# Altium PCB NIXIE_IN-14_big.pcbdoc
Units mm, origin at the board's own origin, x right, y up, seen from the top; angles counter-clockwise.
Board outline 141.22 x 110.49 mm, 2 copper layers (Top Layer, Bottom Layer); 39 components, 62 nets, 239 pads, 0 vias.
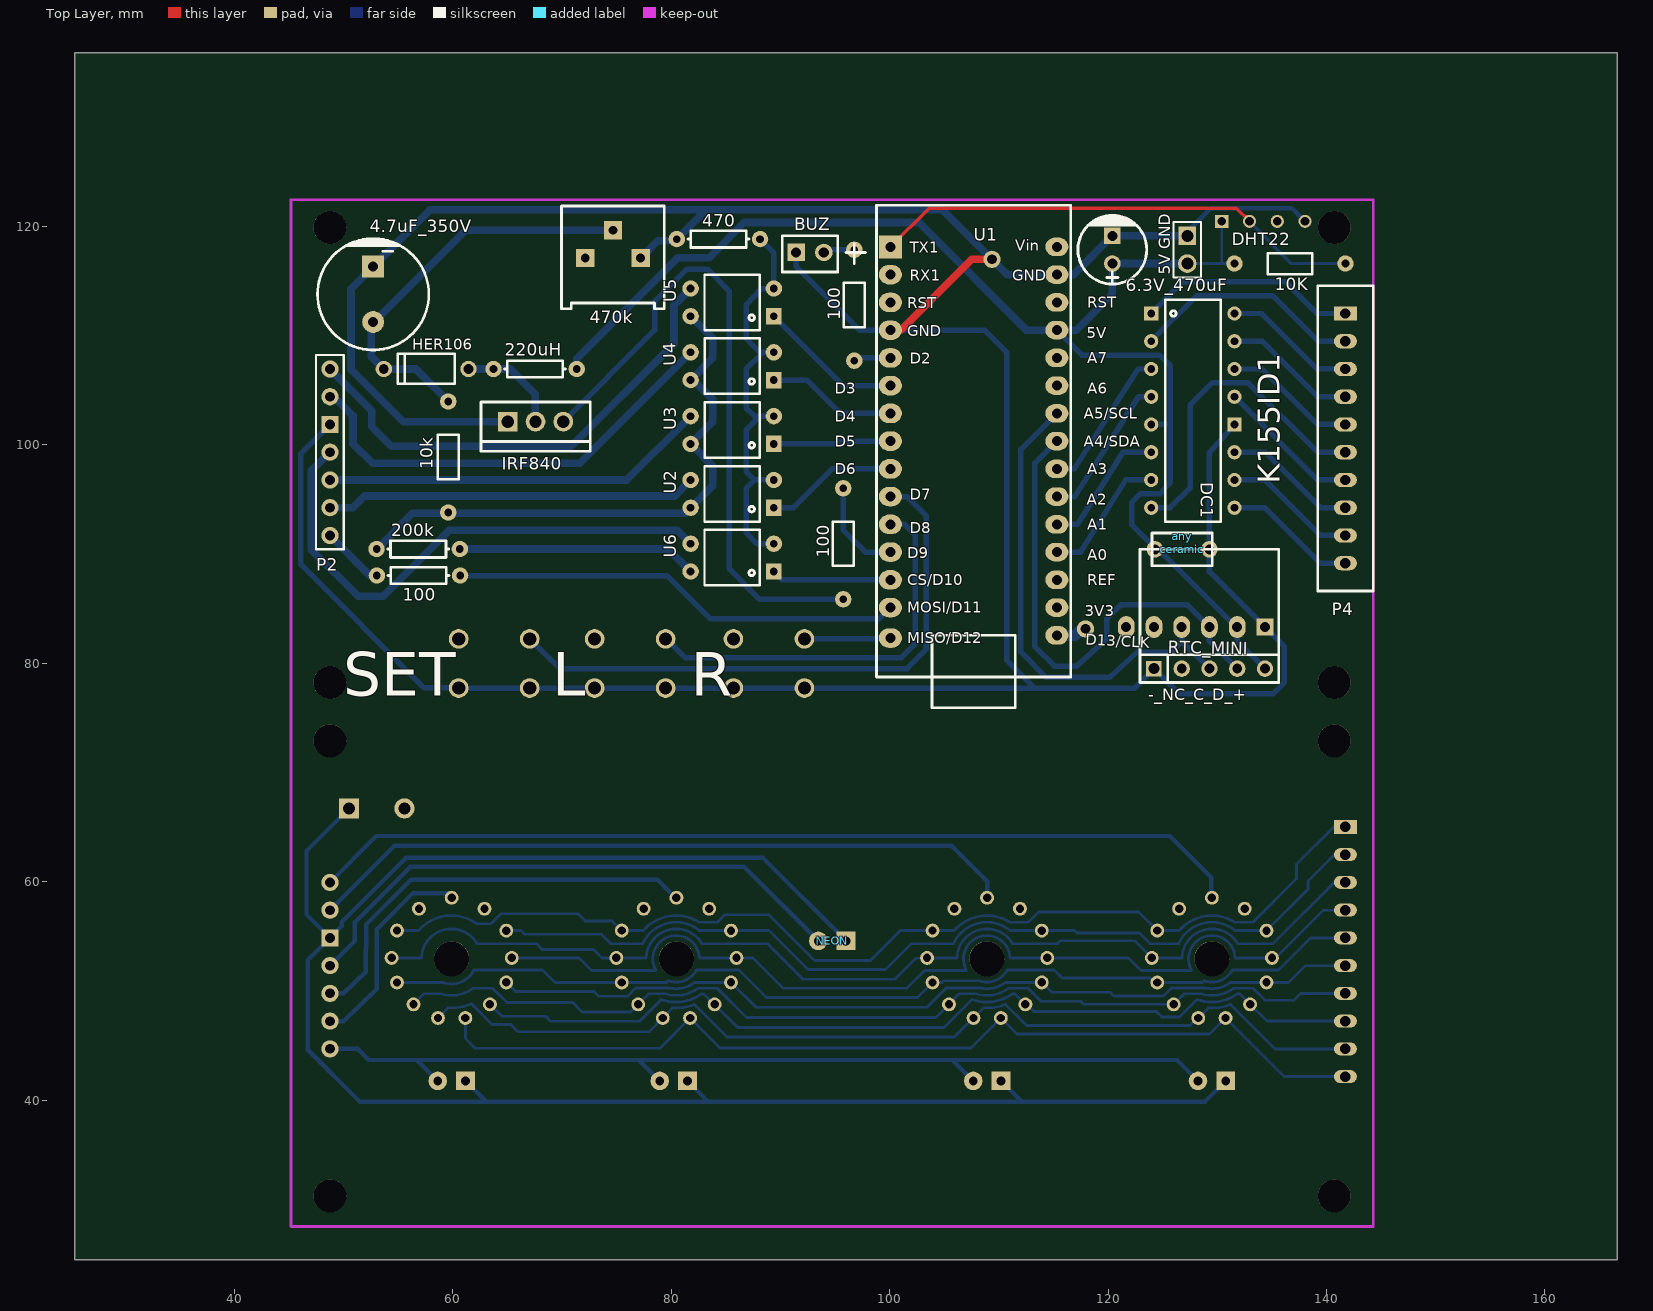
[diagram p0: Top Layer view]
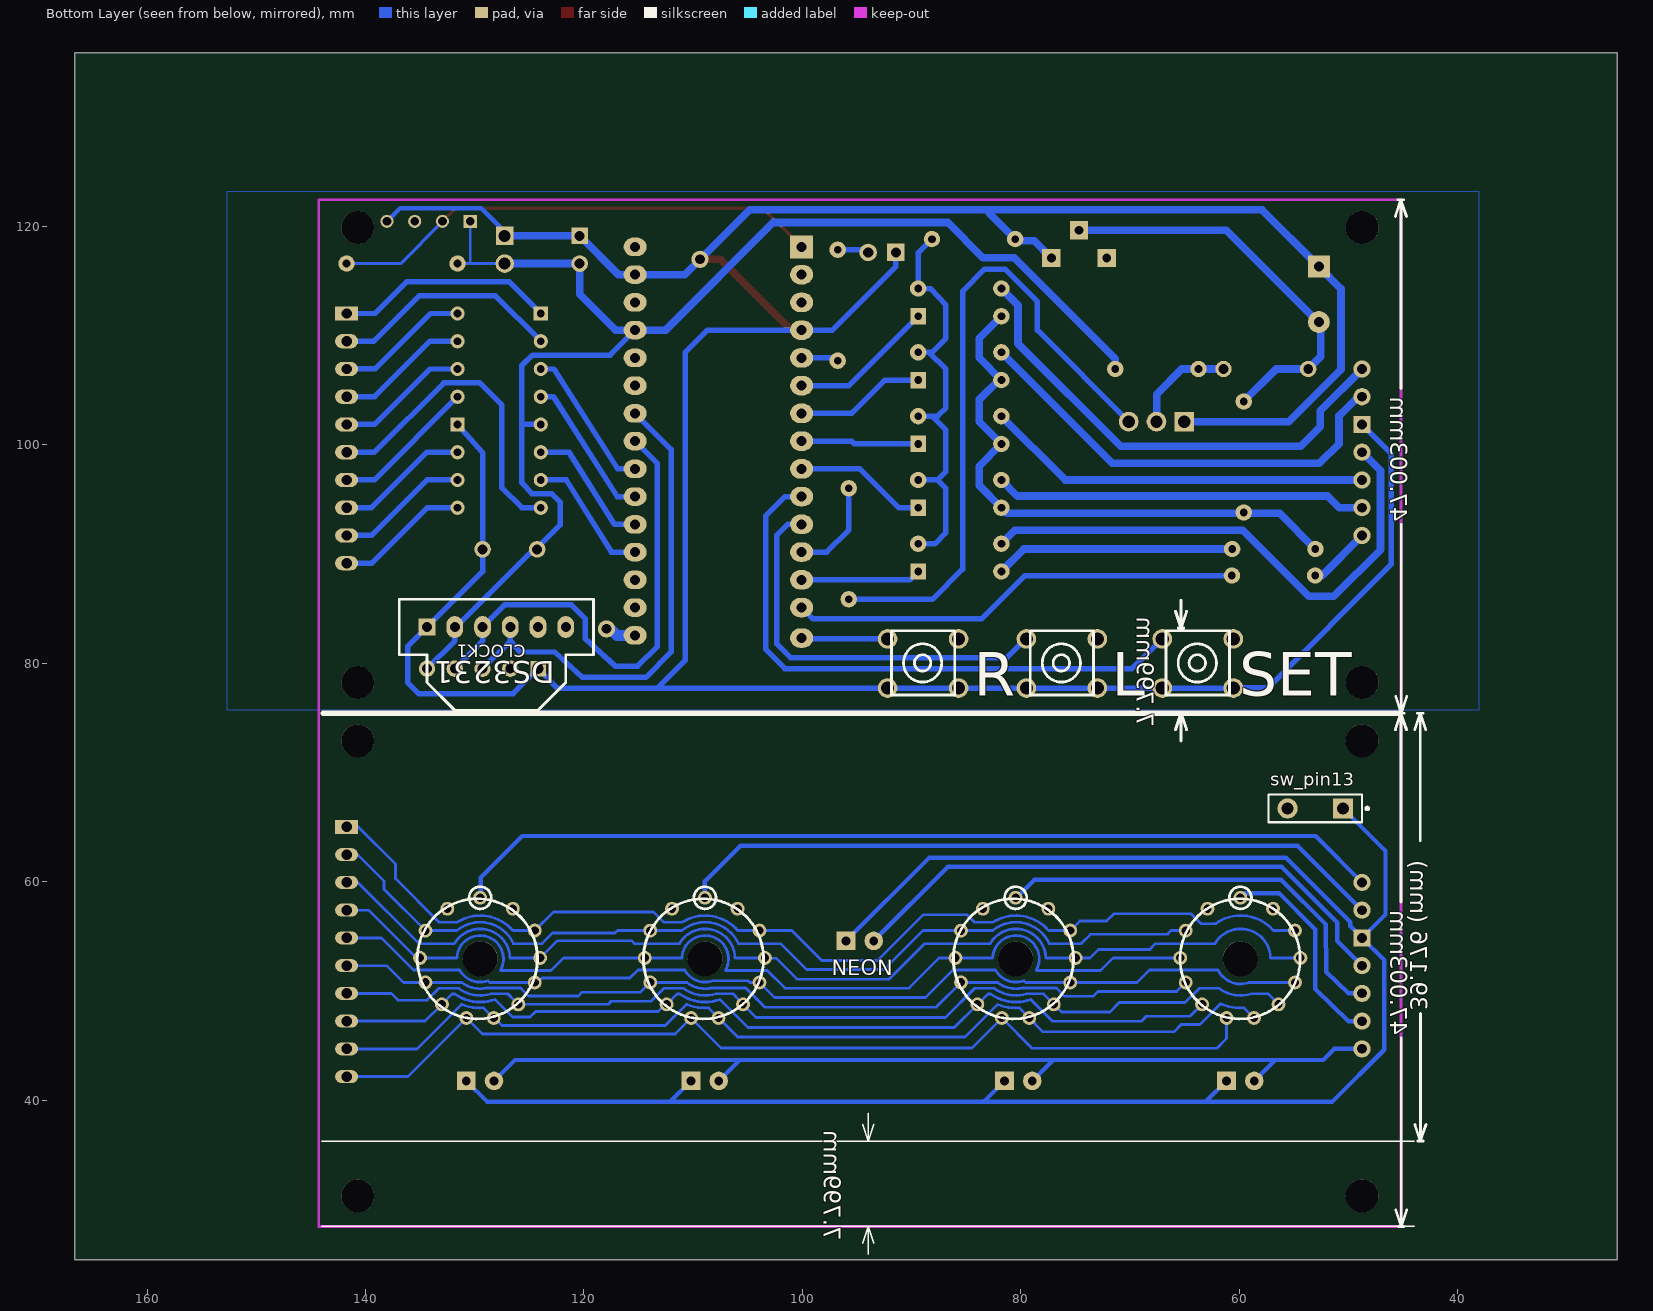
[diagram p1: Bottom Layer view, seen from below]

## Layer stack, top to bottom
Top Solder: solder mask 0.0102, Solder Resist, Dk 3.5
Top Layer: signal copper 0.0356
Dielectric1: dielectric 0.32, FR-4, Dk 4.8
Bottom Layer: signal copper 0.0356
Bottom Solder: solder mask 0.0102, Solder Resist, Dk 3.5

## Board outline
166.624,25.4 25.4,25.4 25.4,135.89 166.624,135.89

## Design rules (kind name [scope] priority, off if disabled: settings)
Clearance [All] p1: gap=0.254 ignorepadtopadclearanceinfootprint=FALSE
DiffPairsRouting [All] p1: maxlimit=0.5 minlimit=0.254 mostfreqgap=0.254 toplayer_minwidth=0.254 toplayer_maxwidth=0.381 toplayer_prefwidth=0.381 bottomlayer_minwidth=0.254 bottomlayer_maxwidth=0.381 bottomlayer_prefwidth=0.381 maxuncoupledlength=12.7
HoleSize [All] p1: absolutevalues=TRUE maxlimit=4.54 minlimit=0.025 maxpercent=80.000 minpercent=20.000
PolygonConnect [All] p1: connectstyle=Relief reliefconductorwidth=0.254 reliefentries=4 polygonreliefangle="90 Angle" airgapwidth=0.254
RoutingVias [All] p1: holewidth=0.711 width=1.27 viastyle="Through Hole" minholewidth=0.711 minwidth=1.27 maxholewidth=0.711 maxwidth=1.27
SilkToSilkClearance [All] p1: silktosilkclearance=0
SolderMaskExpansion [All] p1: expansion=0.102
UnRoutedNet [All] p1: checkbadconnections=TRUE
Width [All] p1: maxlimit=1 minlimit=0.254 preferedwidth=0.254
26 further rules are at their usual default settings.

## Components (designator, comment, footprint, x,y, rotation, side; value= is the part's Value field where it differs from the comment)
4.7uF_350V "4.7u 350В" CP_10X13MM 52.725,113.775 r0 top
"5V GND" "HDR-2X1/2.54" HDR-2X1/2.54 127.254,117.856 r0 top (schematic designator 5V)
6.3V_470uF "CAP-D6.3XF2.5" CAP-D6.3XF2.5 120.396,117.856 r90 top
10k "10k" RC06 59.6,93.8 r90 top
10K "10k" RC06 141.732,116.586 r180 top
100 "22k" RC06 95.758,96.012 r270 top
100 "330k" RC06 96.774,117.856 r270 top
100 "AXIAL-0.3" AXIAL-0.3 56.875,88.025 r0 top
200k "AXIAL-0.3" AXIAL-0.3 56.85,90.45 r0 top
220uH "AXIAL-0.3" AXIAL-0.3 67.548,106.934 r0 top
470 "AXIAL-0.3" AXIAL-0.3 84.335,118.825 r0 top
470k "_" 3386K 74.676,117.094 r0 top
"any / ceramic" "CAP-HV-5.0*3.0" CAP-HV-5.0*3.0 126.746,90.424 r180 top (schematic designator any)
BUZ "Buzzer" 2PIN_mod 87.63,117.602 r180 top
CLOCK1 "DS3231" DS3231 126.746,83.312 r180 bottom
DC1 "К155ИД1" DIP16_mod 123.952,112.014 r270 top (schematic designator DС1)
DHT22 "_" ? 134.275,120.45 r0 top
HER106 "HER106" DO-41 61.452,106.934 r180 top
IRF840 "IRF840" TO-220_mod 67.818,101.854 r180 top
L "KEY-6.0*6.0-2" KEY-6.0*6.0-2 76.2,80.01 r0 bottom (schematic designator S2)
LED "LED" LED3MM 59.909,41.759 r0 top
LED "LED" LED3MM 80.229,41.759 r0 top
LED "LED" LED3MM 108.931,41.759 r0 top
LED "LED" LED3MM 129.505,41.759 r0 top
NEON "LED" LED3MM 94.742,54.581 r0 top
P1 "HDR-7X1/2.54" HDR-7X1/2.54 48.768,52.311 r0 top
P2 "HDR-7X1/2.54" HDR-7X1/2.54 48.768,99.314 r0 top
P3 "10PIN" B10B_mod#1 141.732,54.851 r90 top
P4 "10PIN" B10B_mod#2 141.732,101.854 r90 top
R "KEY-6.0*6.0-2" KEY-6.0*6.0-2 88.9,80.01 r0 bottom (schematic designator S3)
RTC_MINI "HEADER_PRG_1X05" HEADER_PRG_1X05 129.286,79.502 r0 top
SET "KEY-6.0*6.0-2" KEY-6.0*6.0-2 63.754,80.01 r0 bottom (schematic designator S1)
sw_pin13 "sw" SPST-2 53.05,66.7 r0 bottom
U1 "ARDUINO-NANO-V3.0" "ARDUINO_NANO V3" 107.696,100.33 r0 top
U2 "TLP627" DIP4_mod 89.408,94.234 r90 top
U3 "TLP627" DIP4_mod 89.408,100.076 r90 top
U4 "TLP627" DIP4_mod 89.408,105.918 r90 top
U5 "TLP627" DIP4_mod 89.408,111.76 r90 top
U6 "TLP627" DIP4_mod 89.408,88.392 r90 top

## Footprints (in the part's own frame and the unit in brackets; to place one, negate y for a bottom-side part, rotate by r counter-clockwise, add the part's x,y. Pads: shape width x height; smd on the part's side, far side on the other; paste and mask are expansions set on the pad)
2PIN_mod [mm]
  round 1.6 hole 0.95: 1(-6.35,0)
  rect 1.6x1.6 hole 0.95: 2(-3.81,0)
  silkscreen extent -10.16,-1.52 -2.54,1.78
3386K [mil]
  rect 66x66 hole 32: 1(-100.01,0.01) 2(-0.01,100.01) 3(99.99,0.01)
  silkscreen extent -185,-183 185,187
"ARDUINO_NANO V3" [mm]
  rect 2.1x2.1 hole 0.914: 1(-7.62,17.78)
  oval 2.1x1.778 hole 0.914: 2(-7.62,15.24) 3(-7.62,12.7) 4(-7.62,10.16) 5(-7.62,7.62) 6(-7.62,5.08) 7(-7.62,2.54) 8(-7.62,0) 9(-7.62,-2.54) 10(-7.62,-5.08) 11(-7.62,-7.62) 12(-7.62,-10.16) 13(-7.62,-12.7) 14(-7.62,-15.24) 15(-7.62,-18.034)
  oval 2.1x1.7 hole 0.914: 16(7.62,-17.78) 17(7.62,-15.24) 18(7.62,-12.7) 19(7.62,-10.16) 20(7.62,-7.62) 21(7.62,-5.08) 22(7.62,-2.54) 23(7.62,0) 24(7.62,2.54) 25(7.62,5.08) 26(7.62,7.62) 27(7.62,10.16) 28(7.62,12.7) 29(7.62,15.24) 30(7.62,17.78)
  silkscreen extent -8.89,-24.4 8.89,21.59
AXIAL-0.3 [mm]
  round 1.5 hole 0.7: 1(-3.81,0) 2(3.81,0)
  silkscreen extent -2.79,-0.76 2.79,0.76
B10B_mod#1 [mm]
  rect 1.3x2.1 hole 0.95: 1(10.16,0)
  oval 1.2x2.1 hole 0.95: 2(7.62,0) 3(5.08,0) 4(2.54,0) 5(0,0) 6(-2.54,0) 7(-5.08,0) 8(-7.62,0) 9(-10.16,0) 10(-12.7,0)
B10B_mod#2 [mm]
  rect 1.3x2.1 hole 0.95: 1(10.16,0)
  oval 1.3x2.1 hole 0.95: 2(7.62,0) 3(5.08,0) 4(2.54,0) 5(0,0) 6(-2.54,0) 7(-5.08,0) 8(-7.62,0) 9(-10.16,0) 10(-12.7,0)
  silkscreen extent -15.24,-2.54 12.7,2.54
CAP-D6.3XF2.5 [mil]
  round 60 hole 36: 1(-50,0)
  rect 60x60 hole 36: 2(50,0)
  silkscreen extent -124,-124 125,124
CAP-HV-5.0*3.0 [mil]
  round 60 hole 36: 1(-100,0) 2(96.8,0)
  silkscreen extent -110,-59 107,59
CP_10X13MM [mm]
  round 2 hole 0.9: 1(0,-2.54)
  rect 2x2 hole 0.9: 2(0,2.54)
  silkscreen extent -5.1,-5.09 5.1,5.09
DIP4_mod [mm]
  rect 1.5x1.397 hole 0.711: 1(0,0)
  round 1.5 hole 0.711: 2(2.54,0) 3(2.54,7.62) 4(0,7.62)
  silkscreen extent -1.27,1.27 3.81,6.35
DIP16_mod [mm]
  rect 1.3x1.3 hole 0.701: 1(0,0) 12(10.16,7.62)
  round 1.3 hole 0.701: 2(2.54,0) 3(5.08,0) 4(7.62,0) 5(10.16,0) 6(12.7,0) 7(15.24,0) 8(17.78,0) 9(17.78,7.62) 10(15.24,7.62) 11(12.7,7.62) 13(7.62,7.62) 14(5.08,7.62) 15(2.54,7.62) 16(0,7.62)
  silkscreen extent -1.27,1.27 19.05,6.35
DO-41 [mm]
  round 1.5 hole 0.889: 1(0,0) 2(7.747,0)
  silkscreen extent 1.27,-1.37 6.48,1.37
DS3231 [mm]
  rect 1.52x1.52 hole 0.914: 1(-7.62,0)
  oval 1.524x2 hole 0.914: 2(-5.08,0) 3(-2.54,0)
  oval 1.54x2 hole 0.914: 4(0,0) 5(2.54,0) 6(5.08,0)
  silkscreen extent -10.16,-7.62 7.62,2.54
HDR-2X1/2.54 [mm]
  rect 1.575x1.7 hole 1.1: 1(0,1.27)
  round 1.7 hole 1.1: 2(0,-1.27)
  silkscreen extent -1.27,-2.54 1.27,2.54
HDR-7X1/2.54 [mil]
  round 62 hole 35: 1(-0.01,300) 2(-0.01,200) 4(-0.01,0) 5(-0.01,-100) 6(-0.01,-200) 7(-0.01,-300)
  rect 62x62 hole 35: 3(-0.01,100)
HEADER_PRG_1X05 [mm]
  rect 1.415x1.415 hole 1.016: 1(-5.08,0)
  round 1.5 hole 0.9: 2(-2.54,0) 3(0,0) 4(2.54,0) 5(5.08,0)
  silkscreen extent -6.35,-1.27 6.35,1.27
KEY-6.0*6.0-2 [mm]
  round 1.8 hole 1.2: 1(-3.198,2.286) 2(3.302,2.286) 3(-3.198,-2.214) 4(3.302,-2.214)
  silkscreen extent -2.84,-2.96 2.95,2.93
LED3MM [mm]
  round 1.7 hole 0.813: A(-1.27,0)
  rect 1.7x1.7 hole 0.813: K(1.27,0)
RC06 [mm]
  round 1.5 hole 0.711: 1(0,0) 2(10.16,0)
  silkscreen extent 3.05,-0.96 7.11,0.97
SPST-2 [mm] "Switch; 2 Leads"
  rect 1.85x1.85 hole 1.1: 1(-2.54,0)
  round 1.85 hole 1.1: 2(2.54,0)
  silkscreen extent -4.89,-1.27 4.28,1.27
TO-220_mod [mm]
  round 1.8 hole 1.118: 1(-2.312,-0.254) 2(0.229,-0.254)
  rect 1.8x1.8 hole 1.118: 3(2.769,-0.254)
  silkscreen extent -4.78,-2.05 5.22,2.45
? [mm]
  round 1.199 hole 0.798: DATA(-1.321,0) GND(3.759,0) NULL(1.219,0)
  rect 1.199x1.199 hole 0.798: VDD(-3.86,0.003)

## Free pads (board coordinates)
  round 1.27 hole 0.762: 1(59.909,58.523) 1(80.483,58.523) 1(108.931,58.523) 1(129.505,58.523) 2(58.662,47.52) 2(79.236,47.52) 2(107.683,47.52) 2(128.257,47.52) 3(54.412,53.019) 3(74.986,53.019) 3(103.434,53.019) 3(124.008,53.019) 4(65.41,53.019) 4(85.984,53.019) 4(114.432,53.019) 4(135.006,53.019) 5(64.913,55.516) 5(85.487,55.516) 5(113.934,55.516) 5(134.508,55.516) 6(62.914,57.522) 6(83.488,57.522) 6(111.935,57.522) 6(132.509,57.522) 7(54.91,55.521) 7(75.484,55.521) 7(103.932,55.521) 7(124.506,55.521) 8(56.914,57.522) 8(77.488,57.522) 8(105.936,57.522) 8(126.51,57.522) 9(54.91,50.766) 9(75.484,50.766) 9(103.932,50.766) 9(124.506,50.766) 10(56.414,48.769) 10(76.988,48.77) 10(105.436,48.77) 10(126.01,48.77) 11(61.166,47.515) 11(81.74,47.515) 11(110.188,47.515) 11(130.762,47.515) 12(63.411,48.769) 12(83.985,48.77) 12(112.433,48.77) 12(133.007,48.77) 13(64.913,50.776) 13(85.487,50.776) 13(113.934,50.776) 13(134.508,50.776)
  round 1.575 hole 0.889: 214(109.375,116.975) 214(117.937,83.14)
  round 3 hole 3 unplated: ""(48.768,31.229) ""(48.768,72.885) ""(48.768,78.232) ""(48.768,119.888) ""(140.716,78.232) ""(140.716,119.888) ""(140.716,31.229) ""(140.716,72.885)
  round 3.2 hole 3.2 unplated: ""(59.909,52.935) ""(80.483,52.935) ""(108.905,52.935) ""(129.505,52.935)

## Nets (pads, with @x,y where several pads share a name; then routed paths per layer and width w, separated by ;. In a path a pad name is that pad's centre, name@x,y a point inside that pad or via, vN(x,y) a via of type N, cw(c..) or ccw(c..) an arc to the next point about the centre after c; other vN are vias at no path point)
$BoardOutlineNet: 
+5V: 6.3V_470uF.1 10K.2 220uH.2 "5V GND.2" "any / ceramic.2" CLOCK1.2 DC1.5 DHT22.VDD RTC_MINI.5 U1.27 | length 127.3
  Bottom Layer w0.254: 127.254,116.586 130.425,116.586 ; DHT22.VDD 130.415,116.596 130.425,116.586 ; 10K.2 130.425,116.586 ; CLOCK1.2@131.731,83.312 CLOCK1.2
  Bottom Layer w0.5: U1.27 117.602,108.204 124.696,108.204 125.7,107.233 125.7,101.919 ; DC1.5 125.7,101.854 125.7,96.548 124.769,95.504 122.936,95.504 122.174,94.742 122.174,92.666 124.291,90.549 ; 124.287,90.424 124.619,90.424 CLOCK1.2@131.731,83.312 ; CLOCK1.2 131.826,82.042 RTC_MINI.5
  Bottom Layer w0.7: 220uH.2 71.358,107.883 80.6,117.125 83.483,117.125 86.708,120.35 102.675,120.35 112.535,110.49 U1.27 117.094,110.49 120.396,113.792 6.3V_470uF.1 127.254,116.586
B0: DC1.7 U1.19 | length 12.3
  Bottom Layer w0.5: U1.19 117.484,90.17 121.612,96.774 DC1.7
B1: DC1.6 U1.20 | length 12.3
  Bottom Layer w0.5: U1.20 117.202,92.71 121.363,99.314 DC1.6
B2: DC1.4 U1.21 | length 13.6
  Bottom Layer w0.5: U1.21 116.949,95.25 122.791,104.394 DC1.4
B3: DC1.3 U1.22 | length 13.6
  Bottom Layer w0.5: U1.22 116.903,97.79 122.745,106.934 DC1.3
BACKL: 100.1@53.065,88.025 P2.7 | length 5.8
  Bottom Layer w0.7: P2.7 52.437,88.025 100.1@53.065,88.025
BACKL2: LED.A P1.7 | length 88.8
  Bottom Layer w0.4: P1.7 51.309,44.691 52.325,43.675 56.723,43.675 ; LED.A@58.639,41.759 56.723,43.675 ; LED.A@78.959,41.759 77.043,43.675 ; LED.A@107.661,41.759 105.745,43.675 ; LED.A@128.235,41.759 126.319,43.675 105.745,43.675 ; 56.723,43.675 77.043,43.675 ; 77.043,43.675 105.745,43.675
BUTT1: SET.4 U1.10 | length 54.4
  Bottom Layer w0.5: SET.4 69.85,79.502 101.6,79.502 103.378,81.28 103.378,93.472 101.6,95.25 U1.10
BUTT2: L.4 U1.11 | length 36.6
  Bottom Layer w0.5: L.4@79.573,82.225 81.28,80.518 101.092,80.518 102.362,81.788 102.362,91.694 101.346,92.71 U1.11
BUTT3: R.4 U1.15 | length 7.9
  Bottom Layer w0.5: R.4 100.005,82.225 U1.15
BUZZERPIN: 100.1@96.774,117.855 BUZ.1 | length 2.9
  Bottom Layer w0.5: BUZ.1 94.233,117.855 100.1@96.774,117.855
DC1_1: DC1.1 P4.1 | length 20.2
  Bottom Layer w0.5: DC1.1 126.838,114.9 136.225,114.9 139.111,112.014 P4.1
DC1_2: DC1.2 P4.2 | length 21.2
  Bottom Layer w0.5: DC1.2 128.128,113.65 135.05,113.65 139.226,109.474 P4.2
DC1_8: DC1.8 P4.6 | length 29.6
  Bottom Layer w0.5: DC1.8 125.684,94.234 127.508,96.058 127.508,103.632 129.54,105.664 132.836,105.664 139.186,99.314 P4.6
DC1_9: DC1.9 P4.10 | length 12.3
  Bottom Layer w0.5: DC1.9 134.341,94.234 139.421,89.154 P4.10
DC1_10: DC1.10 P4.9 | length 12.3
  Bottom Layer w0.5: DC1.10 134.351,96.774 139.431,91.694 P4.9
DC1_11: DC1.11 P4.8 | length 12.3
  Bottom Layer w0.5: DC1.11 134.386,99.314 139.466,94.234 P4.8
DC1_13: DC1.13 P4.7 | length 13.3
  Bottom Layer w0.5: DC1.13 139.192,96.774 P4.7
DC1_14: DC1.14 P4.5 | length 12.3
  Bottom Layer w0.5: DC1.14 134.091,106.934 139.171,101.854 P4.5
DC1_15: DC1.15 P4.4 | length 12.3
  Bottom Layer w0.5: DC1.15 134.076,109.474 139.156,104.394 P4.4
DC1_16: DC1.16 P4.3 | length 12.3
  Bottom Layer w0.5: DC1.16 134.036,112.014 139.116,106.934 P4.3
DHT22DATA: 10K.1 DHT22.DATA U1.1 | length 45.3
  Top Layer w0.3: U1.1 103.616,121.65 131.754,121.65 DHT22.DATA
  Bottom Layer w0.3: DHT22.DATA@132.954,120.396 136.764,116.586 10K.1
  Bottom Layer w0.5: DHT22.DATA@132.954,120.396 DHT22.DATA
DISP2_3: P3.10 pad.11 | length 89.7
  Bottom Layer w0.254: pad.11@61.166,47.515 61.166,45.634 62.05,44.75 78.975,44.75 81.74,47.515 84.48,44.775 107.448,44.775 110.188,47.515 111.653,46.05 129.297,46.05 130.762,47.515 136.126,42.151 P3.10
DISP2_4: P3.9 pad.2 | length 91.1
  Bottom Layer w0.254: pad.2@58.632,47.52 59.558,48.446 ; 59.566,48.446 ccw(c59.88,52.935) 61.71,48.824 63.609,46.925 65.325,46.925 66,46.25 77.966,46.25 pad.2@79.236,47.52 ; pad.2@79.207,47.52 80.133,48.446 ; 80.141,48.446 ccw(c80.455,52.935) 82.141,48.763 ; 82.138,48.76 85.119,45.78 105.917,45.78 108.583,48.446 ; 108.591,48.446 ccw(c108.905,52.935) 110.591,48.763 ; 110.618,48.769 112.562,46.825 127.516,46.825 128.21,47.52 128.257,47.52 129.183,48.446 129.191,48.446 ccw(c129.505,52.935) 131.191,48.763 ; 131.218,48.769 135.296,44.691 P3.9
DISP2_5: P3.8 pad.12 | length 85.1
  Bottom Layer w0.254: pad.12@63.411,48.769 64.506,47.675 68.525,47.675 68.975,47.225 77.112,47.225 79.101,49.214 ccw(c80.455,52.935) 82.726,49.691 ; 82.75,49.708 83.019,49.708 83.957,48.77 83.985,48.77 86.105,46.65 104.987,46.65 107.551,49.214 ccw(c108.905,52.935) 111.176,49.691 ; 111.2,49.708 111.469,49.708 pad.12@112.407,48.77 ; pad.12@112.433,48.77 112.546,48.77 113.208,48.107 124.418,48.107 124.925,47.6 126.537,47.6 128.151,49.214 ccw(c129.505,52.935) 131.776,49.691 ; 131.8,49.708 132.069,49.708 133.007,48.77 134.546,47.231 P3.8
DISP2_9: P3.4 pad.4 | length 91.8
  Bottom Layer w0.254: pad.4@65.381,53.019 65.41,53.019 71.556,53.019 72.706,51.869 78.57,51.869 ; 78.59,51.901 cw(c80.455,52.935) 82.584,53.047 ; 82.6,53.019 pad.4@85.956,53.019 ; pad.4@85.984,53.019 87.481,53.019 90.25,50.25 101.606,50.25 103.225,51.869 107.02,51.869 ; 107.04,51.901 cw(c108.905,52.935) 111.034,53.047 ; 111.05,53.019 pad.4@114.406,53.019 ; pad.4@114.432,53.019 121.881,53.019 123.031,51.869 127.62,51.869 ; 127.64,51.901 cw(c129.505,52.935) 131.634,53.047 ; 131.65,53.019 135.006,53.019 135.344,53.019 139.716,57.391 P3.4
DISP2_10: P3.3 pad.3 | length 100.8
  Bottom Layer w0.254: pad.3@54.383,53.019 57.115,53.019 ; 57.142,53.031 cw(c59.88,52.935) 62.241,54.326 67.675,54.325 68.2,53.8 72.9,53.8 73.681,53.019 74.986,53.019 77.69,53.019 ; 77.717,53.031 cw(c80.455,52.935) 82.816,54.326 88.8,54.325 92.05,51.075 100.5,51.075 102.418,52.993 103.408,52.993 103.434,53.019 106.14,53.019 ; 106.167,53.031 cw(c108.905,52.935) 111.266,54.326 115.375,54.325 115.65,54.6 122.427,54.6 124.008,53.019 126.74,53.019 ; 126.767,53.031 cw(c129.505,52.935) 131.866,54.326 135.1,54.325 140.706,59.931 P3.3
DISP2_11: P3.2 pad.5 | length 86.2
  Bottom Layer w0.254: pad.5@64.913,55.516 66.266,55.516 66.606,55.175 73.625,55.175 74.475,54.325 77.41,54.325 ; 77.419,54.351 cw(c80.455,52.935) 82.563,55.538 ; 82.61,55.516 pad.5@85.458,55.516 ; pad.5@85.487,55.516 88.959,55.516 92.525,51.95 99.625,51.95 102,54.325 105.86,54.325 ; 105.869,54.351 cw(c108.905,52.935) 111.013,55.538 ; 111.06,55.516 pad.5@113.908,55.516 ; pad.5@113.934,55.516 116.934,55.516 117.15,55.3 122.875,55.3 123.85,54.325 126.46,54.325 ; 126.469,54.351 cw(c129.505,52.935) 131.613,55.538 ; 131.66,55.516 134.508,55.516 138.3,59.308 138.3,60.05 140.721,62.471 P3.2
GND: 4.7uF_350V.2 6.3V_470uF.2 470.1 470k.3 "5V GND.1" "any / ceramic.1" BUZ.2 CLOCK1.1 DC1.12 DHT22.GND IRF840.3 L.1 L.2 P2.3 pad.214@109.375,116.975 R.1 R.2 RTC_MINI.1 SET.1 SET.2 U1.4 U1.29 | length 332.9
  Top Layer w0.5: U1.4 U1.4@101.04,110.49
  Top Layer w0.7: U1.4@101.04,110.49 107.525,116.975 pad.214@109.375,116.975
  Bottom Layer w0.4: 127.254,119.126 127.254,119.504 129.403,121.653 136.831,121.653 137.837,120.647 DHT22.GND@138.29,120.647
  Bottom Layer w0.5: P2.3 46.075,99.161 46.075,98.475 46.075,89.075 57.4,77.75 SET.1@60.683,77.75 ; SET.1@61.064,77.724 SET.2 L.1 L.2 R.1 R.2 122.428,77.724 122.454,77.75 RTC_MINI.1 126.492,77.216 135.128,77.216 136.144,78.232 136.144,81.534 CLOCK1.1 129.286,88.392 129.286,99.282 DC1.12 ; BUZ.2 91.44,116.31 97.26,110.49 108.712,110.49 110.744,108.458 110.744,80.264 113.258,77.75
  Bottom Layer w0.7: IRF840.3 55.475,102.108 50.7,106.883 50.7,114.291 4.7uF_350V.2 57.934,121.525 82.9,121.525 ; 470k.3 78.794,118.672 80.372,118.672 470.1 82.9,121.2 82.9,121.525 ; 127.254,119.126 6.3V_470uF.2 116.84,115.57 110.78,115.57 109.375,116.975 104.825,121.525 82.9,121.525
GND2: LED.K NEON.K P1.3 sw_pin13.1 | length 173.9
  Bottom Layer w0.254: 83.375,39.865 83.375,39.883
  Bottom Layer w0.4: sw_pin13.1 46.625,62.815 46.625,56.994 P1.3 ; LED.K@61.179,41.759 63.073,39.865 ; LED.K@81.499,41.759 83.375,39.883 ; NEON.K 88.418,62.175 55.925,62.175 55.719,62.175 49.85,56.306 49.85,55.933 P1.3 ; LED.K@110.201,41.759 112.095,39.865 ; LED.K@130.775,41.759 128.881,39.865 112.095,39.865 ; P1.3 46.736,52.819 46.736,44.614 51.485,39.865 63.073,39.865 ; 63.073,39.865 83.375,39.865 112.095,39.865
JP2_1: P2.6 U2.3 | length 34.1
  Bottom Layer w0.7: P2.6 50.859,94.234 51.925,95.3 80.314,95.3 U2.3
JP2_2: P2.5 U3.3 | length 35.4
  Bottom Layer w0.7: P2.5 75.946,96.774 U3.3
JP2_3: P2.2 U4.3 | length 41.2
  Bottom Layer w0.7: P2.2 49.131,104.394 50.875,102.65 50.875,100.1 52.675,98.3 71.63,98.3 U4.3
JP2_4: P2.1 U5.3 | length 44.8
  Bottom Layer w0.7: P2.1 52.587,103.114 52.587,101.663 54.375,99.875 70.875,99.875 80.264,109.264 80.264,112.776 U5.3
JP2_5: 10k.1 200k.1 U2.4 U3.4 U4.4 U5.4 | length 53
  Bottom Layer w0.5: U2.4@81.28,93.726 U2.4 ; U4.4 U4.4@82.042,105.918
  Bottom Layer w0.7: 200k.1 56.316,93.726 U2.4@81.28,93.726 ; U2.4 83.82,96.266 83.82,98.044 U3.4 83.82,102.107 83.82,104.14 U4.4@82.042,105.918 ; U4.4 83.82,107.949 83.82,109.728 U5.4
JP7_1: P1.6 pad.1@59.909,58.523 | length 19.3
  Bottom Layer w0.4: P1.6 50.01,47.231 53.051,50.168 53.051,55.626 56.375,58.95 59.482,58.95 pad.1@59.909,58.523
JP7_2: P1.5 pad.1@80.483,58.523 | length 39.1
  Bottom Layer w0.4: P1.5 50.005,49.771 52.054,51.734 52.079,56.079 56.162,60.162 78.77,60.162 pad.1@80.409,58.523
JP7_3: P1.2 pad.1@108.931,58.523 | length 65.5
  Bottom Layer w0.4: P1.2@48.768,57.318 P1.2 54.652,63.275 105.7,63.275 108.931,60.044 pad.1@108.931,58.523
JP7_4: P1.1 pad.1@129.505,58.523 | length 85.9
  Bottom Layer w0.4: P1.1 53.012,64.175 125.65,64.175 129.45,60.375 129.45,58.578 pad.1@129.505,58.523
JP7_5: NEON.A P1.4 | length 52.2
  Bottom Layer w0.4: P1.4 51.05,54.593 51.05,56.275 56.125,61.35 86.703,61.35 NEON.A
KEYB_PIN: U1.25
NEON: 200k.2 U6.4 | length 22
  Bottom Layer w0.7: 200k.2 79.73,90.45 U6.4
optsDot: U1.13 U6.1 | length 11
  Bottom Layer w0.5: U6.1 90.17,87.63 U1.13
optsGND: 470.2 U2.2 U3.2 U4.2 U5.2 U6.2 | length 39.5
  Bottom Layer w0.5: 470.2 89.408,117.562 U5.2 88.292,114.3 86.868,112.791 86.868,109.728 88.138,108.458 88.392,108.458 ; U6.2 87.884,90.932 86.868,91.948 86.868,96.011 87.63,96.774 ; U2.2 87.63,96.774 ; U3.2 88.138,102.616 ; U4.2 88.392,108.458 ; 87.63,96.774 86.868,97.536 86.868,101.346 88.138,102.616 ; 88.138,102.616 87.63,102.616 86.868,103.378 86.868,106.934 88.392,108.458
optsVolt: 4.7uF_350V.1 10k.2 470k.2 HER106.2 | length 37.5
  Bottom Layer w0.7: 10k.2 56.626,106.934 HER106.2 52.562,108.077 52.562,111.252 52.818,111.252 61.2,119.634 470k.2
PEREM: P3.7 pad.10 | length 90.5
  Bottom Layer w0.254: pad.10@56.413,48.77 57.35,49.706 ; 57.35,49.735 58.885,49.735 ; 58.901,49.731 ccw(c59.88,52.935) 61.873,50.242 ; 61.905,50.245 63.655,50.245 64.975,48.925 71,48.925 71.85,48.075 76.293,48.075 76.988,48.77 77.925,49.706 77.925,49.735 79.46,49.735 ; 79.476,49.731 ccw(c80.455,52.935) 82.448,50.242 ; 82.48,50.245 84.23,50.245 86.9,47.575 104.241,47.575 pad.10@105.436,48.77 ; pad.10@105.767,49.128 106.375,49.735 107.91,49.735 ; 107.926,49.731 ccw(c108.905,52.935) 110.898,50.242 ; 110.93,50.245 112.68,50.245 113.875,49.05 117.5,49.05 117.78,48.77 pad.10@126.01,48.77 ; pad.10@126.367,49.128 126.975,49.735 128.51,49.735 ; 128.526,49.731 ccw(c129.505,52.935) 131.498,50.242 ; 131.53,50.245 133.28,50.245 134.375,49.15 137.025,49.15 137.626,49.751 P3.7
PWMPIN: 100.1@95.758,96.012 U1.12 | length 9
  Bottom Layer w0.5: 100.1@95.758,96.011 95.758,92.202 97.79,90.17 U1.12
Q1_2: 220uH.1 HER106.1 IRF840.2 | length 9.6
  Bottom Layer w0.7: HER106.1 65.262,106.934 67.564,104.632 67.564,103.632 IRF840.2
R1_2: 100.2@95.758,85.852 IRF840.1 | length 60.4
  Bottom Layer w0.5: IRF840.1@70.129,102.133 78.486,110.49 78.486,113.111 81.453,116.078 83.312,116.078 85.344,114.046 85.344,88.61 88.102,85.852 100.2@95.758,85.852
RBUZ: 100.2@96.774,107.695 U1.5 | length 3.4
  Bottom Layer w0.5: 100.2@96.774,107.696 97.028,107.95 U1.5
RTC_C: CLOCK1.4 RTC_MINI.3 U1.24 | length 46.4
  Bottom Layer w0.5: U1.24 112.014,99.568 112.014,81.026 114.34,78.7 120.145,78.7 122.682,81.026 125.831,81.026 126.746,82.042 ; RTC_MINI.3 126.746,82.042 ; 126.746,82.042 CLOCK1.4 126.746,82.042
RTC_D: CLOCK1.3 RTC_MINI.4 U1.23 | length 45.4
  Bottom Layer w0.5: U1.23 113.284,98.298 113.284,81.534 115.093,79.725 117.099,79.725 119.888,82.242 119.888,84.074 121.158,85.344 127.254,85.344 CLOCK1.3 129.286,82.042 RTC_MINI.4
S$19328: P3.6 pad.13 | length 81
  Bottom Layer w0.254: pad.13@64.913,50.776 65.739,49.95 72.95,49.95 73.4,49.5 75.992,49.5 76.744,50.252 79.91,50.252 ; 79.932,50.245 ccw(c80.455,52.935) 82.142,50.776 ; 82.15,50.776 pad.13@85.458,50.776 ; pad.13@85.487,50.776 87.763,48.5 103.442,48.5 105.194,50.252 108.36,50.252 ; 108.382,50.245 ccw(c108.905,52.935) 110.592,50.776 ; 110.6,50.776 pad.13@113.908,50.776 ; pad.13@113.934,50.776 114.825,49.885 120.165,49.885 120.509,49.541 125.084,49.541 125.794,50.252 128.96,50.252 ; 128.982,50.245 ccw(c129.505,52.935) 131.192,50.776 ; 131.2,50.776 134.508,50.776 136.526,50.776 138.061,52.311 P3.6
S$19332: P3.5 pad.9 | length 92.4
  Bottom Layer w0.254: pad.9@54.881,50.766 59.06,50.766 ; 59.09,50.764 ccw(c59.88,52.935) 61.938,51.886 ; 61.97,51.919 68.231,51.919 69.384,50.766 75.484,50.766 79.584,50.766 79.743,50.925 ccw(c80.455,52.935) 82.32,51.901 ; 82.35,51.919 86.22,51.919 88.739,49.4 102.566,49.4 103.932,50.766 104.816,50.766 104.975,50.925 108.193,50.925 ccw(c108.905,52.935) 110.77,51.901 ; 110.8,51.919 115,51.919 ; 115.063,51.919 115.807,51.175 123.849,51.175 124.258,50.766 124.506,50.766 128.634,50.766 128.793,50.925 ccw(c129.505,52.935) 131.37,51.901 ; 131.4,51.919 135.6,51.919 138.532,54.851 P3.5
S$19354: P3.1 pad.7 | length 98.5
  Bottom Layer w0.254: pad.7@54.909,55.521 56.878,55.521 ; 56.9,55.543 cw(c59.88,52.935) 62.18,56.159 ; 62.18,56.15 63.525,56.15 64.438,57.063 71.487,57.063 72.15,56.4 74.605,56.4 75.484,55.521 77.453,55.521 77.475,55.543 cw(c80.455,52.935) 82.583,56.275 84.225,56.275 84.925,56.975 88.925,56.975 93.125,52.775 98.232,52.775 100.978,55.521 103.932,55.521 105.9,55.521 ; 105.925,55.543 cw(c108.905,52.935) 111.033,56.275 112.675,56.275 113.625,57.225 122.802,57.225 124.506,55.521 126.5,55.521 ; 126.525,55.543 cw(c129.505,52.935) 131.633,56.275 133.25,56.275 137.25,60.275 137.25,61.6 140.661,65.011 P3.1
TUMBLER: pad.214@117.937,83.14 U1.16 | length 2.9
  Bottom Layer w1: U1.16 116.989,82.55 117.579,83.14 pad.214@117.937,83.14
U1_7: U1.6 U5.1 | length 13.3
  Bottom Layer w0.5: U5.1 95.758,105.41 U1.6
U1_10: U1.8 U3.1 | length 10.8
  Bottom Layer w0.5: U3.1 95.25,100.076 95.504,100.33 U1.8
U1_11: U1.9 U2.1 | length 12.1
  Bottom Layer w0.5: U2.1 91.186,94.234 94.742,97.79 U1.9
U4_1: U1.7 U4.1 | length 11.9
  Bottom Layer w0.5: U4.1 92.456,105.918 95.504,102.87 U1.7
ZAZA: P2.4 U6.3 | length 49.1
  Bottom Layer w0.7: P2.4 47.075,97.621 47.075,95.65 47.075,90.4 51.35,86.125 53.65,86.125 59.7,92.175 80.545,92.175 U6.3
pads on no net: 100.2@60.685,88.025 470k.1 CLOCK1.5 CLOCK1.6 DHT22.NULL L.3 R.3 RTC_MINI.2 SET.3 sw_pin13.2 U1.2 U1.3 U1.14 U1.17 U1.18 U1.26 U1.28 U1.30
copper on no net: | length 41.4
  Bottom Layer w0.5: 60.685,88.025 79.615,88.025 83.566,84.074 99.06,84.074 100.076,85.09

## Polygon pours and split planes (outlines as drawn)
GND on Bottom Layer "Bottom Layer-GND" (solid, shelved, pour order 0): 38.1,123.19 38.1,75.692 152.654,75.692 152.654,123.19

## Keep-outs
Keep-Out Layer:
  lines w0.254: 45.212,28.425 144.272,28.425 144.272,122.428 46.228,122.428 45.212,122.428 45.212,28.425

## Silkscreen, mask and mechanical layers (free items; w line width, h text height)
Top Overlay:
  lines w0.254: 122.936,78.232 122.936,90.424 135.636,90.424 135.636,78.232 122.936,78.232
  text "K155ID1" at 135.727,96.418 h2.03 r90
  text "SET" at 50,77 h4
  text "L" at 69.1,77 h4
  text "R" at 81.8,77 h4
  text "-_NC_C_D_+" at 123.698,76.605 h1.07
Bottom Overlay:
  circle w0.254: c129.759,52.935 r5.499
  circle w0.254: c109.059,52.935 r5.499
  circle w0.254: c80.684,52.935 r5.499
  circle w0.254: c59.934,52.935 r5.499
  circle w0.254: c108.931,58.523 r1.016
  circle w0.254: c129.505,58.523 r1.016
  circle w0.254: c80.483,58.523 r1.016
  circle w0.254: c59.909,58.523 r1.016
  lines w0.154: 43.98,28.439 143.98,28.439 ; 43.98,36.237 143.98,36.237 ; 93.472,26.915 93.98,28.439 ; 93.472,37.761 93.98,36.237 ; 93.98,25.899 93.98,28.439 ; 93.98,38.777 93.98,36.237 ; 94.488,26.915 93.98,28.439 ; 94.488,37.761 93.98,36.237
  lines w0.254: 42.917,37.774 43.425,36.25 ; 42.929,73.903 43.437,75.426 ; 43.171,36.25 43.679,36.25 ; 43.183,75.427 43.691,75.426 ; 43.429,47.941 43.425,36.25 ; 43.433,63.735 43.437,75.426 ; 43.933,37.774 43.425,36.25 ; 43.945,73.902 43.437,75.426 ; 44.668,29.948 45.175,28.424 ; 44.668,76.949 45.175,75.425 ; 44.703,73.903 45.212,75.426 ; 44.703,120.904 45.212,122.428 ; 44.921,28.424 45.429,28.423 ; 44.921,75.425 45.429,75.425 ; 44.958,75.427 45.466,75.426 ; 44.958,122.428 45.466,122.428 ; 45.189,45.704 45.175,28.424 ; 45.189,92.705 45.175,75.425 ; 45.198,58.146 45.212,75.426 ; 45.198,105.148 45.212,122.428 ; 45.684,29.947 45.175,28.424 ; 45.684,76.949 45.175,75.425 ; 45.719,73.902 45.212,75.426 ; 45.719,120.903 45.212,122.428 ; 64.829,73.902 65.337,75.426 ; 64.829,84.749 65.337,83.225 ; 65.083,75.426 65.591,75.426 ; 65.083,83.225 65.591,83.225 ; 65.337,72.886 65.337,75.426 ; 65.337,85.765 65.337,83.225 ; 65.845,73.902 65.337,75.426 ; 65.845,84.749 65.337,83.225
  lines w0.5: 45.466,75.413 143.764,75.413 ; 45.593,75.438 143.891,75.438
  text "47.003mm" at 46.205,92.958 h1.52 r89.95
  text "7.799mm" at 69.392,74.122 h1.52 r90
  text "39.176 (mm)" at 44.343,48.195 h1.52 r89.98
  text "47.003mm" at 46.205,45.957 h1.52 r89.95
  text "7.799mm" at 98.035,27.134 h1.52 r90

## Dimensions
45.212,122.428 to 144.272,122.428 on Bottom Overlay

## Text inside footprints (layer, text, board x,y; h text height)
470k: Document "3" at 77.67,120.643 h0.76 r169; Document "1" at 71.501,115.443 h0.51 r180; Document "2" at 72.771,119.253 h0.51 r180; Document "3" at 77.273,115.436 h0.51 r167
U1: Top Overlay "D6" at 94.996,97.282 h1.02; Top Overlay "TX1" at 101.854,117.556 h1.02; Top Overlay "GND" at 111.252,115.016 h1.02; Top Overlay "5V" at 118.075,109.729 h1.02; Top Overlay "MISO/D12" at 101.626,81.811 h1.02; Top Overlay "Vin" at 111.515,117.764 h1.02; Top Overlay "D13/CLK" at 117.9,81.7 h1.02 r357; Top Overlay "GND" at 101.6,109.936 h1.02; Top Overlay "RX1" at 101.854,115.016 h1.02; Top Overlay "RST" at 101.6,112.476 h1.02; Top Overlay "D2" at 101.854,107.396 h1.02; Top Overlay "D3" at 94.996,104.648 h1.02; Top Overlay "D4" at 94.996,102.108 h1.02; Top Overlay "D5" at 94.996,99.822 h1.02; Top Overlay "D7" at 101.854,94.95 h1.02; Top Overlay "D8" at 101.854,91.902 h1.02; Top Overlay "D9" at 101.6,89.616 h1.02; Top Overlay "CS/D10" at 101.626,87.145 h1.02; Top Overlay "MOSI/D11" at 101.626,84.605 h1.02; Top Overlay "3V3" at 117.856,84.282 h1.02; Top Overlay "REF" at 118.11,87.122 h1.02; Top Overlay "A0" at 118.084,89.408 h1.02; Top Overlay "A1" at 118.11,92.202 h1.02; Top Overlay "A2" at 118.075,94.489 h1.02; Top Overlay "A3" at 118.11,97.282 h1.02; Top Overlay "A4/SDA" at 117.775,99.825 h1.02; Top Overlay "A5/SCL" at 117.775,102.375 h1.02; Top Overlay "A6" at 118.084,104.648 h1.02; Top Overlay "A7" at 118.11,107.442 h1.02; Top Overlay "RST" at 118.11,112.522 h1.02